# Altium PCB 数粒机发射板12通道.PcbDoc
Units mm, origin at the board's own origin, x right, y up, seen from the top; angles counter-clockwise.
Board outline 326 x 60 mm, 4 copper layers (TopLayer, MidLayer1, MidLayer2, BottomLayer); 49 components, 49 nets, 121 pads, 0 vias.
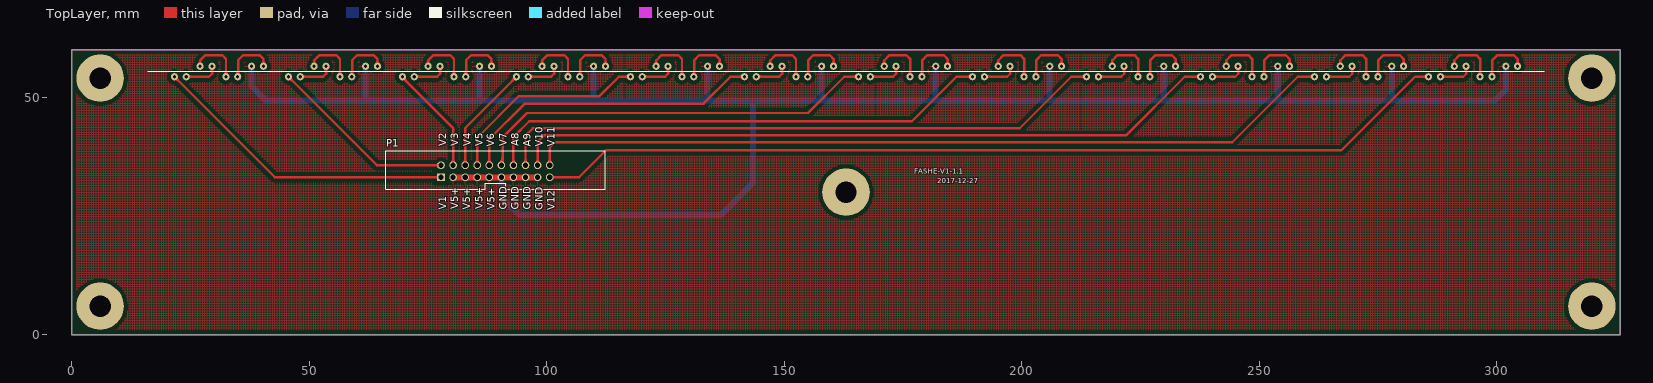
[diagram p0: TopLayer view]
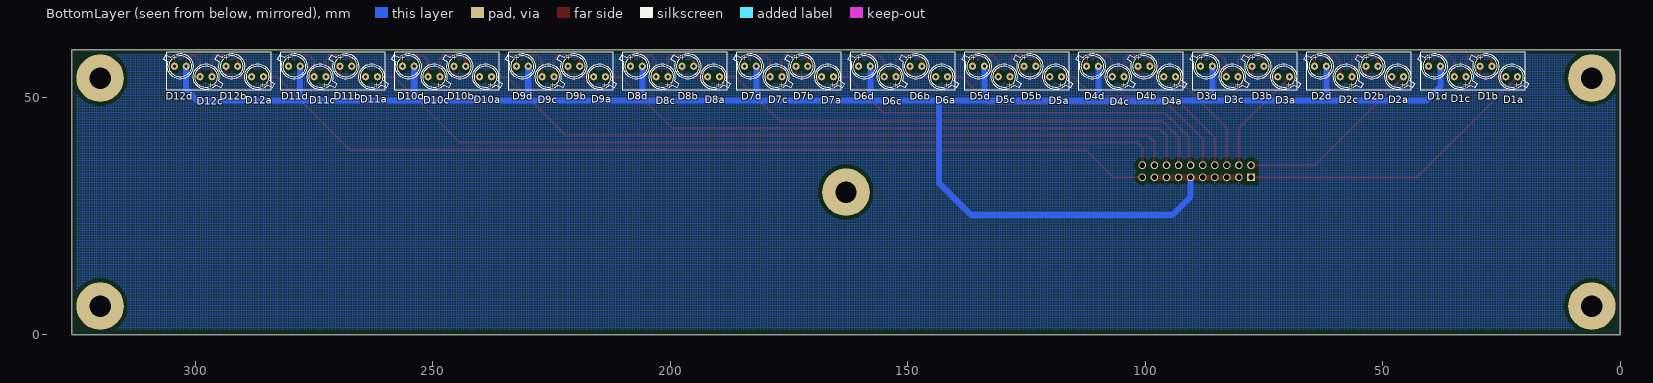
[diagram p1: BottomLayer view, seen from below]

## Layer stack, top to bottom
TopLayer: signal copper 0.0356
Dielectric: core 0.32, FR-4, Dk 4.8
MidLayer1: signal copper 0.0356
Dielectric: dielectric 0.32, FR-4, Dk 4.8
MidLayer2: signal copper 0.0356
Dielectric: dielectric 0.32, FR-4, Dk 4.8
BottomLayer: signal copper 0.0356

## Board outline
0,0 326,0 326,60 0,60

## Design rules (kind name [scope] priority, off if disabled: settings)
Clearance [All] p1: gap=0.762
PolygonConnect [All] p1: connectstyle=Relief reliefconductorwidth=0.254 reliefentries=4 polygonreliefangle="90 Angle"
RoutingLayers [All] p1: top layer_v5=TRUE mid layer 1_v5=FALSE mid layer 2_v5=FALSE bottom layer_v5=TRUE
RoutingVias RoutingVias_1 [All] p1: holewidth=1 width=2 viastyle="Through Hole" minholewidth=0.711 minwidth=1.27 maxholewidth=1 maxwidth=2
SilkscreenOverComponentPads [All] p1: minsilkscreentomaskgap=0.254
SolderMaskExpansion [All] p1: expansion=0.102
TestPointUsage [All] p1: valid=0 allowmultiple=FALSE
Testpoint [All] p1: side=15 testpointundercomponent=TRUE minsize=1.016 maxsize=2.54 preferedsize=1.524 minholesize=0.508 maxholesize=1.016 preferedholesize=0.813 testpointgrid=0.025 style=1023 order=0123456789
Width [All] p1: maxlimit=3.81 minlimit=0.203 preferedwidth=0.508
22 further rules are at their usual default settings.

## Components (designator, comment, footprint, x,y, rotation, side; value= is the part's Value field where it differs from the comment)
D1a "红外接收珠子" EL-1KL3 21.625,54.3 r0 bottom
D1b "红外接收珠子" EL-1KL3 29.535,56.5 r180 bottom
D1c "红外接收珠子" EL-1KL3 32.465,54.3 r0 bottom
D1d "红外接收珠子" EL-1KL3 40.375,56.5 r180 bottom
D2a "红外接收珠子" EL-1KL3 45.625,54.3 r0 bottom
D2b "红外接收珠子" EL-1KL3 53.535,56.5 r180 bottom
D2c "红外接收珠子" EL-1KL3 56.465,54.3 r0 bottom
D2d "红外接收珠子" EL-1KL3 64.375,56.5 r180 bottom
D3a "红外接收珠子" EL-1KL3 69.625,54.3 r0 bottom
D3b "红外接收珠子" EL-1KL3 77.535,56.5 r180 bottom
D3c "红外接收珠子" EL-1KL3 80.465,54.3 r0 bottom
D3d "红外接收珠子" EL-1KL3 88.375,56.5 r180 bottom
D4a "红外接收珠子" EL-1KL3 93.625,54.3 r0 bottom
D4b "红外接收珠子" EL-1KL3 101.535,56.5 r180 bottom
D4c "红外接收珠子" EL-1KL3 104.465,54.3 r0 bottom
D4d "红外接收珠子" EL-1KL3 112.375,56.5 r180 bottom
D5a "红外接收珠子" EL-1KL3 117.625,54.3 r0 bottom
D5b "红外接收珠子" EL-1KL3 125.535,56.5 r180 bottom
D5c "红外接收珠子" EL-1KL3 128.465,54.3 r0 bottom
D5d "红外接收珠子" EL-1KL3 136.375,56.5 r180 bottom
D6a "红外接收珠子" EL-1KL3 141.625,54.3 r0 bottom
D6b "红外接收珠子" EL-1KL3 149.535,56.5 r180 bottom
D6c "红外接收珠子" EL-1KL3 152.465,54.3 r0 bottom
D6d "红外接收珠子" EL-1KL3 160.375,56.5 r180 bottom
D7a "红外接收珠子" EL-1KL3 165.625,54.3 r0 bottom
D7b "红外接收珠子" EL-1KL3 173.535,56.5 r180 bottom
D7c "红外接收珠子" EL-1KL3 176.465,54.3 r0 bottom
D7d "红外接收珠子" EL-1KL3 184.375,56.5 r180 bottom
D8a "红外接收珠子" EL-1KL3 189.625,54.3 r0 bottom
D8b "红外接收珠子" EL-1KL3 197.535,56.5 r180 bottom
D8c "红外接收珠子" EL-1KL3 200.465,54.3 r0 bottom
D8d "红外接收珠子" EL-1KL3 208.375,56.5 r180 bottom
D9a "红外接收珠子" EL-1KL3 213.625,54.3 r0 bottom
D9b "红外接收珠子" EL-1KL3 221.535,56.5 r180 bottom
D9c "红外接收珠子" EL-1KL3 224.465,54.3 r0 bottom
D9d "红外接收珠子" EL-1KL3 232.375,56.5 r180 bottom
D10a "红外接收珠子" EL-1KL3 237.625,54.3 r0 bottom
D10b "红外接收珠子" EL-1KL3 245.535,56.5 r180 bottom
D10c "红外接收珠子" EL-1KL3 248.465,54.3 r0 bottom
D10d "红外接收珠子" EL-1KL3 256.375,56.5 r180 bottom
D11a "红外接收珠子" EL-1KL3 261.625,54.3 r0 bottom
D11b "红外接收珠子" EL-1KL3 269.535,56.5 r180 bottom
D11c "红外接收珠子" EL-1KL3 272.465,54.3 r0 bottom
D11d "红外接收珠子" EL-1KL3 280.375,56.5 r180 bottom
D12a "红外接收珠子" EL-1KL3 285.625,54.3 r0 bottom
D12b "红外接收珠子" EL-1KL3 293.535,56.5 r180 bottom
D12c "红外接收珠子" EL-1KL3 296.465,54.3 r0 bottom
D12d "红外接收珠子" EL-1KL3 304.375,56.5 r180 bottom
P1 "Header 10X2" niujiaocha20p 77.758,33.128 r0 top (schematic designator P)

## Footprints (in the part's own frame and the unit in brackets; to place one, negate y for a bottom-side part, rotate by r counter-clockwise, add the part's x,y. Pads: shape width x height; smd on the part's side, far side on the other; paste and mask are expansions set on the pad)
EL-1KL3 [mm]
  round 1.5 hole 0.65: 1(0,0) 2(2.49,0)
  silkscreen extent -2.31,-2.7 3.93,2.7
niujiaocha20p [mm]
  rect 1.6x1.6 hole 1.1: 1(0,0)
  round 1.6 hole 1.1: 2(0,2.54) 3(2.54,0) 4(2.54,2.54) 5(5.08,0) 6(5.08,2.54) 7(7.62,0) 8(7.62,2.54) 9(10.16,0) 10(10.16,2.54) 11(12.7,0) 12(12.7,2.54) 13(15.24,0) 14(15.24,2.54) 15(17.78,0) 16(17.78,2.54) 17(20.32,0) 18(20.32,2.54) 19(22.86,0) 20(22.86,2.54)
  silkscreen extent -11.68,-2.54 34.54,5.59

## Part data
D1a D1b D1c D1d D2a D2b D2c D2d D3a D3b D3c D3d D4a D4b D4c D4d D5a D5b D5c D5d D6a D6b D6c D6d D7a D7b D7c D7d D8a D8b D8c D8d D9a D9b D9c D9d D10a D10b D10c D10d D11a D11b D11c D11d D12a D12b D12c D12d: library part LED0, "PD15-21B/TR8"
P1: "Header, 10-Pin, Dual row"

## Free pads (board coordinates)
  round 10 hole 4.5 unplated: 1(6,54) 2(6,6) 2(163,30) 5(320,54) 6(320,6)

## Nets (pads, with @x,y where several pads share a name; then routed paths per layer and width w, separated by ;. In a path a pad name is that pad's centre, name@x,y a point inside that pad or via, vN(x,y) a via of type N, cw(c..) or ccw(c..) an arc to the next point about the centre after c; other vN are vias at no path point)
GND: D1d.2 D2d.2 D3d.2 D4d.2 D5d.2 D6d.2 D7d.2 D8d.2 D9d.2 D10d.2 D11d.2 D12d.2 P1.3 P1.5 P1.7 P1.9 P1.11 P1.13 P1.15 P1.17 | length 443.2
  TopLayer w1.27: P1.3 P1.5 P1.7 P1.9 P1.11 P1.13 P1.15 P1.17
  BottomLayer w1.27: D1d.2 37.885,52.25 40.859,49.276 61.998,49.276 ; D2d.2 61.885,49.389 61.998,49.276 ; 85.885,49.389 D3d.2 ; P1.11 90.458,29.071 94.357,25.171 136.648,25.171 143.379,31.902 143.379,49.276 ; 109.885,49.389 D4d.2 ; 133.885,49.389 D5d.2 ; 157.885,49.389 D6d.2 ; 181.885,49.389 D7d.2 ; 205.885,49.389 D8d.2 ; 229.885,49.389 D9d.2 ; 253.885,49.389 D10d.2 ; 277.885,49.389 D11d.2 ; D12d.2 301.885,51.597 299.564,49.276 143.379,49.276 ; 61.998,49.276 143.379,49.276
NetD1a_2: D1a.2 D1b.1 | length 11
  TopLayer w0.508: D1a.2 28.922,54.3 29.562,54.94 29.562,56.473 D1b.1 ; D1a.2@24.466,53.949 cw(c25.312,53.103) 25.312,54.3 cw(c25.312,55.497) D1a.2@24.466,54.651 ; D1b.1@29.184,56.149 cw(c28.273,55.238) 29.562,55.238 ; 29.562,55.367 cw(c30.668,55.367) D1b.1@29.886,56.149
NetD1b_2: D1b.2 D1c.1 | length 15
  TopLayer w0.508: D1b.2@26.694,56.851 ccw(c25.848,57.697) 27.045,57.697 ccw(c28.242,57.697) D1b.2@27.396,56.851 ; D1b.2 27.045,57.732 28.165,58.852 31.695,58.852 32.483,58.064 32.483,54.318 D1c.1 ; D1c.1@32.114,54.651 ccw(c31.224,55.54) 32.483,55.54 ; 32.483,55.454 ccw(c33.619,55.454) D1c.1@32.816,54.651
NetD1c_2: D1c.2 D1d.1 | length 14.9
  TopLayer w0.508: D1c.2@34.604,54.651 ccw(c33.471,55.784) 35.074,55.784 ; D1c.2 35.074,54.419 35.074,57.816 36.115,58.857 39.564,58.857 40.382,58.039 40.382,56.507 D1d.1 ; 35.074,55.211 ccw(c35.866,55.211) D1c.2@35.306,54.651 ; D1d.1@40.024,56.851 ccw(c39.16,57.715) 40.382,57.715 ; 40.382,57.68 ccw(c41.555,57.68) D1d.1@40.726,56.851
NetD2a_2: D2a.2 D2b.1 | length 11
  TopLayer w0.508: D2a.2 52.922,54.3 53.562,54.94 53.562,56.473 D2b.1 ; D2a.2@48.466,53.949 cw(c49.312,53.103) 49.312,54.3 cw(c49.312,55.497) D2a.2@48.466,54.651 ; D2b.1@53.184,56.149 cw(c52.273,55.238) 53.562,55.238 ; 53.562,55.367 cw(c54.668,55.367) D2b.1@53.886,56.149
NetD2b_2: D2b.2 D2c.1 | length 15
  TopLayer w0.508: D2b.2@50.694,56.851 ccw(c49.848,57.697) 51.045,57.697 ccw(c52.243,57.698) D2b.2@51.396,56.851 ; D2b.2 51.045,57.732 52.165,58.852 55.695,58.852 56.483,58.064 56.483,54.318 D2c.1 ; D2c.1@56.114,54.651 ccw(c55.225,55.54) 56.483,55.54 ; 56.483,55.454 ccw(c57.619,55.454) D2c.1@56.816,54.651
NetD2c_2: D2c.2 D2d.1 | length 14.9
  TopLayer w0.508: D2c.2@58.604,54.651 ccw(c57.471,55.784) 59.074,55.784 ; D2c.2 59.074,54.419 59.074,57.816 60.115,58.857 63.564,58.857 64.382,58.039 64.382,56.507 D2d.1 ; 59.074,55.211 ccw(c59.866,55.211) D2c.2@59.306,54.651 ; D2d.1@64.024,56.851 ccw(c63.16,57.715) 64.382,57.715 ; 64.382,57.68 ccw(c65.555,57.68) D2d.1@64.726,56.851
NetD3a_2: D3a.2 D3b.1 | length 11
  TopLayer w0.508: D3a.2 76.922,54.3 77.562,54.94 77.562,56.473 D3b.1 ; D3a.2@72.466,53.949 cw(c73.312,53.103) 73.312,54.3 cw(c73.312,55.497) D3a.2@72.466,54.651 ; D3b.1@77.184,56.149 cw(c76.273,55.238) 77.562,55.238 ; 77.562,55.367 cw(c78.668,55.367) D3b.1@77.886,56.149
NetD3b_2: D3b.2 D3c.1 | length 15
  TopLayer w0.508: D3b.2@74.694,56.851 ccw(c73.848,57.697) 75.045,57.697 ccw(c76.243,57.698) D3b.2@75.396,56.851 ; D3b.2 75.045,57.732 76.165,58.852 79.695,58.852 80.483,58.064 80.483,54.318 D3c.1 ; D3c.1@80.114,54.651 ccw(c79.225,55.54) 80.483,55.54 ; 80.483,55.454 ccw(c81.619,55.454) D3c.1@80.816,54.651
NetD3c_2: D3c.2 D3d.1 | length 14.9
  TopLayer w0.508: D3c.2@82.604,54.651 ccw(c81.471,55.784) 83.074,55.784 ; D3c.2 83.074,54.419 83.074,57.816 84.115,58.857 87.564,58.857 88.382,58.039 88.382,56.507 D3d.1 ; 83.074,55.211 ccw(c83.866,55.211) D3c.2@83.306,54.651 ; D3d.1@88.024,56.851 ccw(c87.16,57.715) 88.382,57.715 ; 88.382,57.68 ccw(c89.555,57.68) D3d.1@88.726,56.851
NetD4a_2: D4a.2 D4b.1 | length 11
  TopLayer w0.508: D4a.2 100.922,54.3 101.562,54.94 101.562,56.473 D4b.1 ; D4a.2@96.466,53.949 cw(c97.312,53.103) 97.312,54.3 cw(c97.312,55.497) D4a.2@96.466,54.651 ; D4b.1@101.184,56.149 cw(c100.273,55.238) 101.562,55.238 ; 101.562,55.367 cw(c102.668,55.367) D4b.1@101.886,56.149
NetD4b_2: D4b.2 D4c.1 | length 15
  TopLayer w0.508: D4b.2@98.694,56.851 ccw(c97.848,57.697) 99.045,57.697 ccw(c100.242,57.697) D4b.2@99.396,56.851 ; D4b.2 99.045,57.732 100.165,58.852 103.695,58.852 104.483,58.064 104.483,54.318 D4c.1 ; D4c.1@104.114,54.651 ccw(c103.225,55.54) 104.483,55.54 ; 104.483,55.455 ccw(c105.62,55.455) D4c.1@104.816,54.651
NetD4c_2: D4c.2 D4d.1 | length 14.9
  TopLayer w0.508: D4c.2@106.604,54.651 ccw(c105.471,55.784) 107.074,55.784 ; D4c.2 107.074,54.419 107.074,57.816 108.115,58.857 111.564,58.857 112.382,58.039 112.382,56.507 D4d.1 ; 107.074,55.211 ccw(c107.866,55.211) D4c.2@107.306,54.651 ; D4d.1@112.024,56.851 ccw(c111.16,57.715) 112.382,57.715 ; 112.382,57.68 ccw(c113.555,57.68) D4d.1@112.726,56.851
NetD5a_2: D5a.2 D5b.1 | length 11
  TopLayer w0.508: D5a.2 124.922,54.3 125.562,54.94 125.562,56.473 D5b.1@125.535,56.5 ; D5a.2@120.466,53.949 cw(c121.312,53.103) 121.312,54.3 cw(c121.312,55.497) D5a.2@120.466,54.651 ; D5b.1@125.184,56.149 cw(c124.273,55.238) 125.562,55.238 ; 125.562,55.367 cw(c126.668,55.367) D5b.1@125.886,56.149
NetD5b_2: D5b.2 D5c.1 | length 15
  TopLayer w0.508: D5b.2@122.694,56.851 ccw(c121.848,57.697) 123.045,57.697 ccw(c124.243,57.698) D5b.2@123.396,56.851 ; D5b.2 123.045,57.732 124.165,58.852 127.695,58.852 128.483,58.064 128.483,54.318 D5c.1 ; D5c.1@128.114,54.651 ccw(c127.225,55.54) 128.483,55.54 ; 128.483,55.454 ccw(c129.619,55.454) D5c.1@128.816,54.651
NetD5c_2: D5c.2 D5d.1 | length 14.9
  TopLayer w0.508: D5c.2@130.604,54.651 ccw(c129.471,55.784) 131.074,55.784 ; D5c.2 131.074,54.419 131.074,57.816 132.115,58.857 135.564,58.857 136.382,58.039 136.382,56.507 D5d.1 ; 131.074,55.211 ccw(c131.866,55.211) D5c.2@131.306,54.651 ; D5d.1@136.024,56.851 ccw(c135.16,57.715) 136.382,57.715 ; 136.382,57.68 ccw(c137.555,57.68) D5d.1@136.726,56.851
NetD6a_2: D6a.2 D6b.1 | length 11
  TopLayer w0.508: D6a.2 148.922,54.3 149.562,54.94 149.562,56.473 D6b.1 ; D6a.2@144.466,53.949 cw(c145.312,53.103) 145.312,54.3 cw(c145.312,55.497) D6a.2@144.466,54.651 ; D6b.1@149.184,56.149 cw(c148.273,55.238) 149.562,55.238 ; 149.562,55.367 cw(c150.668,55.367) D6b.1@149.886,56.149
NetD6b_2: D6b.2 D6c.1 | length 15
  TopLayer w0.508: D6b.2@146.694,56.851 ccw(c145.848,57.697) 147.045,57.697 ccw(c148.242,57.697) D6b.2@147.396,56.851 ; D6b.2 147.045,57.732 148.165,58.852 151.695,58.852 152.483,58.064 152.483,54.318 D6c.1 ; D6c.1@152.114,54.651 ccw(c151.225,55.54) 152.483,55.54 ; 152.483,55.455 ccw(c153.62,55.455) D6c.1@152.816,54.651
NetD6c_2: D6c.2 D6d.1 | length 14.9
  TopLayer w0.508: D6c.2@154.604,54.651 ccw(c153.471,55.784) 155.074,55.784 ; D6c.2 155.074,54.419 155.074,57.816 156.115,58.857 159.564,58.857 160.382,58.039 160.382,56.507 D6d.1 ; 155.074,55.211 ccw(c155.866,55.211) D6c.2@155.306,54.651 ; D6d.1@160.024,56.851 ccw(c159.16,57.715) 160.382,57.715 ; 160.382,57.68 ccw(c161.555,57.68) D6d.1@160.726,56.851
NetD7a_2: D7a.2 D7b.1 | length 11
  TopLayer w0.508: D7a.2 172.922,54.3 173.562,54.94 173.562,56.473 D7b.1 ; D7a.2@168.466,53.949 cw(c169.312,53.103) 169.312,54.3 cw(c169.312,55.497) D7a.2@168.466,54.651 ; D7b.1@173.184,56.149 cw(c172.273,55.238) 173.562,55.238 ; 173.562,55.367 cw(c174.668,55.367) D7b.1@173.886,56.149
NetD7b_2: D7b.2 D7c.1 | length 15
  TopLayer w0.508: D7b.2@170.694,56.851 ccw(c169.848,57.697) 171.045,57.697 ccw(c172.243,57.698) D7b.2@171.396,56.851 ; D7b.2 171.045,57.732 172.165,58.852 175.695,58.852 176.483,58.064 176.483,54.318 D7c.1 ; D7c.1@176.114,54.651 ccw(c175.225,55.54) 176.483,55.54 ; 176.483,55.454 ccw(c177.619,55.454) D7c.1@176.816,54.651
NetD7c_2: D7c.2 D7d.1 | length 14.9
  TopLayer w0.508: D7c.2@178.604,54.651 ccw(c177.471,55.784) 179.074,55.784 ; D7c.2 179.074,54.419 179.074,57.816 180.115,58.857 183.564,58.857 184.382,58.039 184.382,56.507 D7d.1 ; 179.074,55.211 ccw(c179.866,55.211) D7c.2@179.306,54.651 ; D7d.1@184.024,56.851 ccw(c183.16,57.715) 184.382,57.715 ; 184.382,57.68 ccw(c185.555,57.68) D7d.1@184.726,56.851
NetD8a_2: D8a.2 D8b.1 | length 11
  TopLayer w0.508: D8a.2 196.922,54.3 197.562,54.94 197.562,56.473 D8b.1 ; D8a.2@192.466,53.949 cw(c193.312,53.103) 193.312,54.3 cw(c193.312,55.497) D8a.2@192.466,54.651 ; D8b.1@197.184,56.149 cw(c196.273,55.238) 197.562,55.238 ; 197.562,55.367 cw(c198.668,55.367) D8b.1@197.886,56.149
NetD8b_2: D8b.2 D8c.1 | length 15
  TopLayer w0.508: D8b.2@194.694,56.851 ccw(c193.848,57.697) 195.045,57.697 ccw(c196.242,57.697) D8b.2@195.396,56.851 ; D8b.2 195.045,57.732 196.165,58.852 199.695,58.852 200.483,58.064 200.483,54.318 D8c.1@200.465,54.3 ; D8c.1@200.114,54.651 ccw(c199.225,55.54) 200.483,55.54 ; 200.483,55.455 ccw(c201.62,55.455) D8c.1@200.816,54.651
NetD8c_2: D8c.2 D8d.1 | length 14.9
  TopLayer w0.508: D8c.2@202.604,54.651 ccw(c201.471,55.784) 203.074,55.784 ; D8c.2 203.074,54.419 203.074,57.816 204.115,58.857 207.564,58.857 208.382,58.039 208.382,56.507 D8d.1 ; 203.074,55.211 ccw(c203.866,55.211) D8c.2@203.306,54.651 ; D8d.1@208.024,56.851 ccw(c207.16,57.715) 208.382,57.715 ; 208.382,57.68 ccw(c209.555,57.68) D8d.1@208.726,56.851
NetD9a_2: D9a.2 D9b.1 | length 11
  TopLayer w0.508: D9a.2 220.922,54.3 221.562,54.94 221.562,56.473 D9b.1 ; D9a.2@216.466,53.949 cw(c217.312,53.103) 217.312,54.3 cw(c217.312,55.497) D9a.2@216.466,54.651 ; D9b.1@221.184,56.149 cw(c220.273,55.238) 221.562,55.238 ; 221.562,55.367 cw(c222.668,55.367) D9b.1@221.886,56.149
NetD9b_2: D9b.2 D9c.1 | length 15
  TopLayer w0.508: D9b.2@218.694,56.851 ccw(c217.848,57.697) 219.045,57.697 ccw(c220.243,57.698) D9b.2@219.396,56.851 ; D9b.2 219.045,57.732 220.165,58.852 223.695,58.852 224.483,58.064 224.483,54.318 D9c.1 ; D9c.1@224.114,54.651 ccw(c223.225,55.54) 224.483,55.54 ; 224.483,55.454 ccw(c225.619,55.454) D9c.1@224.816,54.651
NetD9c_2: D9c.2 D9d.1 | length 14.9
  TopLayer w0.508: D9c.2@226.604,54.651 ccw(c225.471,55.784) 227.074,55.784 ; D9c.2 227.074,54.419 227.074,57.816 228.115,58.857 231.564,58.857 232.382,58.039 232.382,56.507 D9d.1@232.375,56.5 ; 227.074,55.211 ccw(c227.866,55.211) D9c.2@227.306,54.651 ; D9d.1@232.024,56.851 ccw(c231.16,57.715) 232.382,57.715 ; 232.382,57.68 ccw(c233.555,57.68) D9d.1@232.726,56.851
NetD10a_2: D10a.2 D10b.1 | length 11
  TopLayer w0.508: D10a.2 244.922,54.3 245.562,54.94 245.562,56.473 D10b.1 ; D10a.2@240.466,53.949 cw(c241.312,53.103) 241.312,54.3 cw(c241.312,55.497) D10a.2@240.466,54.651 ; D10b.1@245.184,56.149 cw(c244.273,55.238) 245.562,55.238 ; 245.562,55.367 cw(c246.668,55.367) D10b.1@245.886,56.149
NetD10b_2: D10b.2 D10c.1 | length 15
  TopLayer w0.508: D10b.2@242.694,56.851 ccw(c241.848,57.697) 243.045,57.697 ccw(c244.242,57.697) D10b.2@243.396,56.851 ; D10b.2 243.045,57.732 244.165,58.852 247.695,58.852 248.483,58.064 248.483,54.318 D10c.1 ; D10c.1@248.114,54.651 ccw(c247.225,55.54) 248.483,55.54 ; 248.483,55.455 ccw(c249.62,55.455) D10c.1@248.816,54.651
NetD10c_2: D10c.2 D10d.1 | length 14.9
  TopLayer w0.508: D10c.2@250.604,54.651 ccw(c249.471,55.784) 251.074,55.784 ; D10c.2 251.074,54.419 251.074,57.816 252.115,58.857 255.564,58.857 256.382,58.039 256.382,56.507 D10d.1 ; 251.074,55.211 ccw(c251.866,55.211) D10c.2@251.306,54.651 ; D10d.1@256.024,56.851 ccw(c255.16,57.715) 256.382,57.715 ; 256.382,57.68 ccw(c257.555,57.68) D10d.1@256.726,56.851
NetD11a_2: D11a.2 D11b.1 | length 11
  TopLayer w0.508: D11a.2 268.922,54.3 269.562,54.94 269.562,56.473 D11b.1 ; D11a.2@264.466,53.949 cw(c265.312,53.103) 265.312,54.3 cw(c265.312,55.497) D11a.2@264.466,54.651 ; D11b.1@269.184,56.149 cw(c268.273,55.238) 269.562,55.238 ; 269.562,55.367 cw(c270.668,55.367) D11b.1@269.886,56.149
NetD11b_2: D11b.2 D11c.1 | length 15
  TopLayer w0.508: D11b.2@266.694,56.851 ccw(c265.848,57.697) 267.045,57.697 ccw(c268.243,57.698) D11b.2@267.396,56.851 ; D11b.2 267.045,57.732 268.165,58.852 271.695,58.852 272.483,58.064 272.483,54.318 D11c.1 ; D11c.1@272.114,54.651 ccw(c271.225,55.54) 272.483,55.54 ; 272.483,55.454 ccw(c273.619,55.454) D11c.1@272.816,54.651
NetD11c_2: D11c.2 D11d.1 | length 14.9
  TopLayer w0.508: D11c.2@274.604,54.651 ccw(c273.471,55.784) 275.074,55.784 ; D11c.2 275.074,54.419 275.074,57.816 276.115,58.857 279.564,58.857 280.382,58.039 280.382,56.507 D11d.1 ; 275.074,55.211 ccw(c275.866,55.211) D11c.2@275.306,54.651 ; D11d.1@280.024,56.851 ccw(c279.16,57.715) 280.382,57.715 ; 280.382,57.68 ccw(c281.555,57.68) D11d.1@280.726,56.851
NetD12a_2: D12a.2 D12b.1 | length 11
  TopLayer w0.508: D12a.2 292.922,54.3 293.562,54.94 293.562,56.473 D12b.1 ; D12a.2@288.466,53.949 cw(c289.312,53.103) 289.312,54.3 cw(c289.312,55.497) D12a.2@288.466,54.651 ; D12b.1@293.184,56.149 cw(c292.273,55.238) 293.562,55.238 ; 293.562,55.367 cw(c294.668,55.367) D12b.1@293.886,56.149
NetD12b_2: D12b.2 D12c.1 | length 15
  TopLayer w0.508: D12b.2@290.694,56.851 ccw(c289.848,57.697) 291.045,57.697 ccw(c292.242,57.697) D12b.2@291.396,56.851 ; D12b.2 291.045,57.732 292.165,58.852 295.695,58.852 296.483,58.064 296.483,54.318 D12c.1 ; D12c.1@296.114,54.651 ccw(c295.225,55.54) 296.483,55.54 ; 296.483,55.455 ccw(c297.62,55.455) D12c.1@296.816,54.651
NetD12c_2: D12c.2 D12d.1 | length 14.9
  TopLayer w0.508: D12c.2@298.604,54.651 ccw(c297.471,55.784) 299.074,55.784 ; D12c.2 299.074,54.419 299.074,57.816 300.115,58.857 303.564,58.857 304.382,58.039 304.382,56.507 D12d.1 ; 299.074,55.211 ccw(c299.866,55.211) D12c.2@299.306,54.651 ; D12d.1@304.024,56.851 ccw(c303.16,57.715) 304.382,57.715 ; 304.382,57.68 ccw(c305.555,57.68) D12d.1@304.726,56.851
VOUT1: D1a.1 P1.1 | length 68.9
  TopLayer w0.508: D1a.1@21.625,53.804 cw(c21.625,52.625) 22.459,53.459 ; D1a.1 21.625,54.293 42.789,33.128 P1.1 ; D1a.1@22.121,54.3 ccw(c23.337,54.3) 22.477,53.441 ; P1.1@77.372,32.742 ccw(c76.44,31.81) 76.44,33.128 ccw(c76.44,34.446) P1.1@77.372,33.514
VOUT2: D2a.1 P1.2 | length 43.8
  TopLayer w0.508: D2a.1@45.625,53.804 cw(c45.625,52.625) 46.459,53.459 ; D2a.1 45.625,54.293 64.249,35.668 P1.2 ; D2a.1@46.121,54.3 ccw(c47.337,54.3) 46.477,53.441 ; P1.2@77.372,35.282 ccw(c76.44,34.35) 76.44,35.668 ccw(c76.44,36.986) P1.2@77.372,36.054
VOUT3: D3a.1 P1.4 | length 27
  TopLayer w0.508: D3a.1@69.625,53.804 cw(c69.625,52.918) 70.251,53.545 ; D3a.1 69.625,54.171 80.298,43.498 P1.4 ; D3a.1@70.121,54.3 ccw(c71.63,54.3) 70.563,53.233 ; P1.4@79.912,36.054 ccw(c78.98,36.986) 80.298,36.986 ccw(c81.616,36.986) P1.4@80.684,36.054
VOUT4: D4a.1 P1.6 | length 27.1
  TopLayer w0.508: P1.6@82.452,36.054 ccw(c81.52,36.986) 82.838,36.986 ccw(c84.156,36.986) P1.6@83.224,36.054 ; P1.6 82.838,43.513 D4a.1 ; D4a.1@93.129,54.3 cw(c91.932,54.3) 92.778,53.453 cw(c93.625,52.607) D4a.1@93.625,53.804
VOUT5: D5a.1 P1.8 | length 47.3
  TopLayer w0.508: P1.8@84.992,36.054 ccw(c84.06,36.986) 85.378,36.986 ccw(c86.696,36.986) P1.8@85.764,36.054 ; P1.8 85.378,41.465 94.129,50.216 111.104,50.216 115.189,54.3 D5a.1 ; D5a.1@117.274,53.949 ccw(c116.428,53.103) 116.428,54.3 ccw(c116.428,55.497) D5a.1@117.274,54.651
VOUT6: D6a.1 P1.10 | length 68.6
  TopLayer w0.508: P1.10@87.532,36.054 ccw(c86.6,36.986) 87.918,36.986 ccw(c89.236,36.986) P1.10@88.304,36.054 ; P1.10 87.918,41.16 95.399,48.641 133.016,48.641 138.675,54.3 D6a.1 ; D6a.1@141.274,53.949 ccw(c140.428,53.103) 140.428,54.3 ccw(c140.428,55.497) D6a.1@141.274,54.651
VOUT7: D7a.1 P1.12 | length 89.8
  TopLayer w0.508: P1.12@90.072,36.054 ccw(c88.495,37.631) 90.725,37.631 ; P1.12 90.725,35.935 90.725,41.529 95.856,46.66 154.987,46.66 162.627,54.3 D7a.1 ; D7a.1@165.274,53.949 ccw(c164.428,53.103) 164.428,54.3 ccw(c164.428,55.497) D7a.1@165.274,54.651
VOUT8: D8a.1 P1.14 | length 111.8
  TopLayer w0.508: P1.14@92.612,36.054 ccw(c91.68,36.986) 92.998,36.986 ccw(c94.316,36.986) P1.14@93.384,36.054 ; P1.14 92.998,41.592 96.338,44.933 176.882,44.933 186.249,54.3 D8a.1 ; D8a.1@189.274,53.949 ccw(c188.428,53.103) 188.428,54.3 ccw(c188.428,55.497) D8a.1@189.274,54.651
VOUT9: D9a.1 P1.16 | length 133.4
  TopLayer w0.508: P1.16@95.152,36.054 ccw(c94.22,36.986) 95.538,36.986 ccw(c96.856,36.986) P1.16@95.924,36.054 ; P1.16 95.538,41.897 97.1,43.459 199.564,43.459 210.405,54.3 D9a.1 ; D9a.1@213.274,53.949 ccw(c212.428,53.103) 212.428,54.3 ccw(c212.428,55.497) D9a.1@213.274,54.651
VOUT10: D10a.1 P1.18 | length 154.1
  TopLayer w0.508: P1.18@97.692,36.054 ccw(c96.76,36.986) 98.078,36.986 ccw(c99.396,36.986) P1.18@98.464,36.054 ; P1.18 98.078,40.551 99.539,42.012 222.027,42.012 234.316,54.3 D10a.1 ; D10a.1@237.274,53.949 ccw(c236.428,53.103) 236.428,54.3 ccw(c236.428,55.497) D10a.1@237.274,54.651
VOUT11: D11a.1 P1.20 | length 174.8
  TopLayer w0.508: P1.20@100.232,36.054 ccw(c99.3,36.986) 100.618,36.986 ccw(c101.936,36.986) P1.20@101.004,36.054 ; P1.20 100.618,39.357 101.774,40.513 244.319,40.513 258.106,54.3 D11a.1 ; D11a.1@261.274,53.949 ccw(c260.428,53.103) 260.428,54.3 ccw(c260.428,55.497) D11a.1@261.274,54.651
VOUT12: D12a.1 P1.19 | length 197.7
  TopLayer w0.508: P1.19 106.81,33.128 112.493,38.811 267.306,38.811 282.795,54.3 D12a.1 ; P1.19@101.004,32.742 cw(c101.936,31.81) 101.936,33.128 cw(c101.936,34.446) P1.19@101.004,33.514 ; D12a.1@285.274,53.949 ccw(c284.428,53.103) 284.428,54.3 ccw(c284.428,55.497) D12a.1@285.274,54.651

## Polygon pours and split planes (outlines as drawn)
GND on TopLayer "TopOverlay-No Net" (hatched 90Degree grid 0.508 track 0.254, remove dead copper, pour order 1000): 0,60 0,0 326,0 326,60
GND on TopLayer "TopLayer-GND 2" (hatched 90Degree grid 0.508 track 0.508, remove dead copper, pour order 1002): 151.503,27.688
GND on BottomLayer "TopOverlay-No Net" (hatched 90Degree grid 0.508 track 0.254, remove dead copper, pour order 1001): 0,60 0,0 326,0 326,60
GND on BottomLayer "BottomLayer-GND 2" (hatched 90Degree grid 0.508 track 0.508, remove dead copper, pour order 1006): 303.159,41.642
GND on BottomLayer "BottomLayer-GND 3" (hatched 90Degree grid 0.508 track 0.508, remove dead copper, pour order 1007): 4.059,25.773

## Keep-outs
KeepOutLayer:
  the board outline again, w0.254

## Silkscreen, mask and mechanical layers (free items; w line width, h text height)
TopOverlay:
  lines w0.254: 16,55.4 310,55.4
  text "The Six Hole Size Diameter=4.5mm" at 132.215,86.377 h2
  text "V2" at 78.859,39.683 h1.5 r90
  text "V3" at 81.394,39.683 h1.5 r90
  text "V4" at 83.979,39.683 h1.5 r90
  text "V5" at 86.509,39.628 h1.5 r90
  text "V7" at 91.574,39.628 h1.5 r90
  text "A8" at 94.074,39.628 h1.5 r90
  text "V6" at 88.984,39.598 h1.5 r90
  text "V10" at 99.194,39.598 h1.5 r90
  text "A9" at 96.604,39.573 h1.5 r90
  text "V11" at 101.724,39.573 h1.5 r90
  text "FASHE-V1-1.1" at 177.403,33.886 h1.1
  text "2017-12-27" at 182.248,31.884 h1.1
  text "V5+" at 81.364,26.388 h1.5 r90
  text "V5+" at 86.509,26.358 h1.5 r90
  text "V1" at 78.804,26.333 h1.5 r90
  text "V5+" at 83.949,26.333 h1.5 r90
  text "V5+" at 89.014,26.303 h1.5 r90
  text "GND" at 91.599,26.273 h1.5 r90
  text "GND" at 94.104,26.273 h1.5 r90
  text "GND" at 96.634,26.248 h1.5 r90
  text "GND" at 99.219,26.218 h1.5 r90
  text "V12" at 101.724,26.218 h1.5 r90
BottomOverlay:
  lines w0.254: 20,51.4 42,51.4 42,59.4 20,59.4 20,51.4 ; 44,51.4 66,51.4 66,59.4 44,59.4 44,51.4 ; 68,51.4 90,51.4 90,59.4 68,59.4 68,51.4 ; 92,51.4 114,51.4 114,59.4 92,59.4 92,51.4 ; 116,51.4 138,51.4 138,59.4 116,59.4 116,51.4 ; 140,51.4 162,51.4 162,59.4 140,59.4 140,51.4 ; 164,51.4 186,51.4 186,59.4 164,59.4 164,51.4 ; 188,51.4 210,51.4 210,59.4 188,59.4 188,51.4 ; 212,51.4 234,51.4 234,59.4 212,59.4 212,51.4 ; 236,51.4 258,51.4 258,59.4 236,59.4 236,51.4 ; 260,51.4 282,51.4 282,59.4 260,59.4 260,51.4 ; 284,51.4 306,51.4 306,59.4 284,59.4 284,51.4
Mechanical1:
  the board outline again, w0.254

## Dimensions
320,6 to 163,30 on TopOverlay
326,60 to 310,55.4 on TopOverlay
320,54 to 320,6 on TopOverlay
6,54 to 320,54 on TopOverlay
0,60 to 0,0 on TopOverlay
326,0 to 0,0 on TopOverlay
20,51.4 to 44,51.4 on TopOverlay
6,54 to 163,30 on TopOverlay

## Text inside footprints (layer, text, board x,y; h text height)
D1a: BottomOverlay "+" at 22.26,53.24 h1.2 r90
D1b: BottomOverlay "+" at 28.9,57.56 h1.2 r270
D1c: BottomOverlay "+" at 33.1,53.24 h1.2 r90
D1d: BottomOverlay "+" at 39.74,57.56 h1.2 r270
D2a: BottomOverlay "+" at 46.26,53.24 h1.2 r90
D2b: BottomOverlay "+" at 52.9,57.56 h1.2 r270
D2c: BottomOverlay "+" at 57.1,53.24 h1.2 r90
D2d: BottomOverlay "+" at 63.74,57.56 h1.2 r270
D3a: BottomOverlay "+" at 70.26,53.24 h1.2 r90
D3b: BottomOverlay "+" at 76.9,57.56 h1.2 r270
D3c: BottomOverlay "+" at 81.1,53.24 h1.2 r90
D3d: BottomOverlay "+" at 87.74,57.56 h1.2 r270
D4a: BottomOverlay "+" at 94.26,53.24 h1.2 r90
D4b: BottomOverlay "+" at 100.9,57.56 h1.2 r270
D4c: BottomOverlay "+" at 105.1,53.24 h1.2 r90
D4d: BottomOverlay "+" at 111.74,57.56 h1.2 r270
D5a: BottomOverlay "+" at 118.26,53.24 h1.2 r90
D5b: BottomOverlay "+" at 124.9,57.56 h1.2 r270
D5c: BottomOverlay "+" at 129.1,53.24 h1.2 r90
D5d: BottomOverlay "+" at 135.74,57.56 h1.2 r270
D6a: BottomOverlay "+" at 142.26,53.24 h1.2 r90
D6b: BottomOverlay "+" at 148.9,57.56 h1.2 r270
D6c: BottomOverlay "+" at 153.1,53.24 h1.2 r90
D6d: BottomOverlay "+" at 159.74,57.56 h1.2 r270
D7a: BottomOverlay "+" at 166.26,53.24 h1.2 r90
D7b: BottomOverlay "+" at 172.9,57.56 h1.2 r270
D7c: BottomOverlay "+" at 177.1,53.24 h1.2 r90
D7d: BottomOverlay "+" at 183.74,57.56 h1.2 r270
D8a: BottomOverlay "+" at 190.26,53.24 h1.2 r90
D8b: BottomOverlay "+" at 196.9,57.56 h1.2 r270
D8c: BottomOverlay "+" at 201.1,53.24 h1.2 r90
D8d: BottomOverlay "+" at 207.74,57.56 h1.2 r270
D9a: BottomOverlay "+" at 214.26,53.24 h1.2 r90
D9b: BottomOverlay "+" at 220.9,57.56 h1.2 r270
D9c: BottomOverlay "+" at 225.1,53.24 h1.2 r90
D9d: BottomOverlay "+" at 231.74,57.56 h1.2 r270
D10a: BottomOverlay "+" at 238.26,53.24 h1.2 r90
D10b: BottomOverlay "+" at 244.9,57.56 h1.2 r270
D10c: BottomOverlay "+" at 249.1,53.24 h1.2 r90
D10d: BottomOverlay "+" at 255.74,57.56 h1.2 r270
D11a: BottomOverlay "+" at 262.26,53.24 h1.2 r90
D11b: BottomOverlay "+" at 268.9,57.56 h1.2 r270
D11c: BottomOverlay "+" at 273.1,53.24 h1.2 r90
D11d: BottomOverlay "+" at 279.74,57.56 h1.2 r270
D12a: BottomOverlay "+" at 286.26,53.24 h1.2 r90
D12b: BottomOverlay "+" at 292.9,57.56 h1.2 r270
D12c: BottomOverlay "+" at 297.1,53.24 h1.2 r90
D12d: BottomOverlay "+" at 303.74,57.56 h1.2 r270